# Altium PCB 核心板.PcbDoc (part 1 of 2)
Units mil, origin at the board's own origin, x right, y up, seen from the top; angles counter-clockwise.
Board outline 3687.4 x 2855.91 mil, 2 copper layers (Top Layer, Bottom Layer); 94 components, 147 nets, 533 pads, 209 vias.
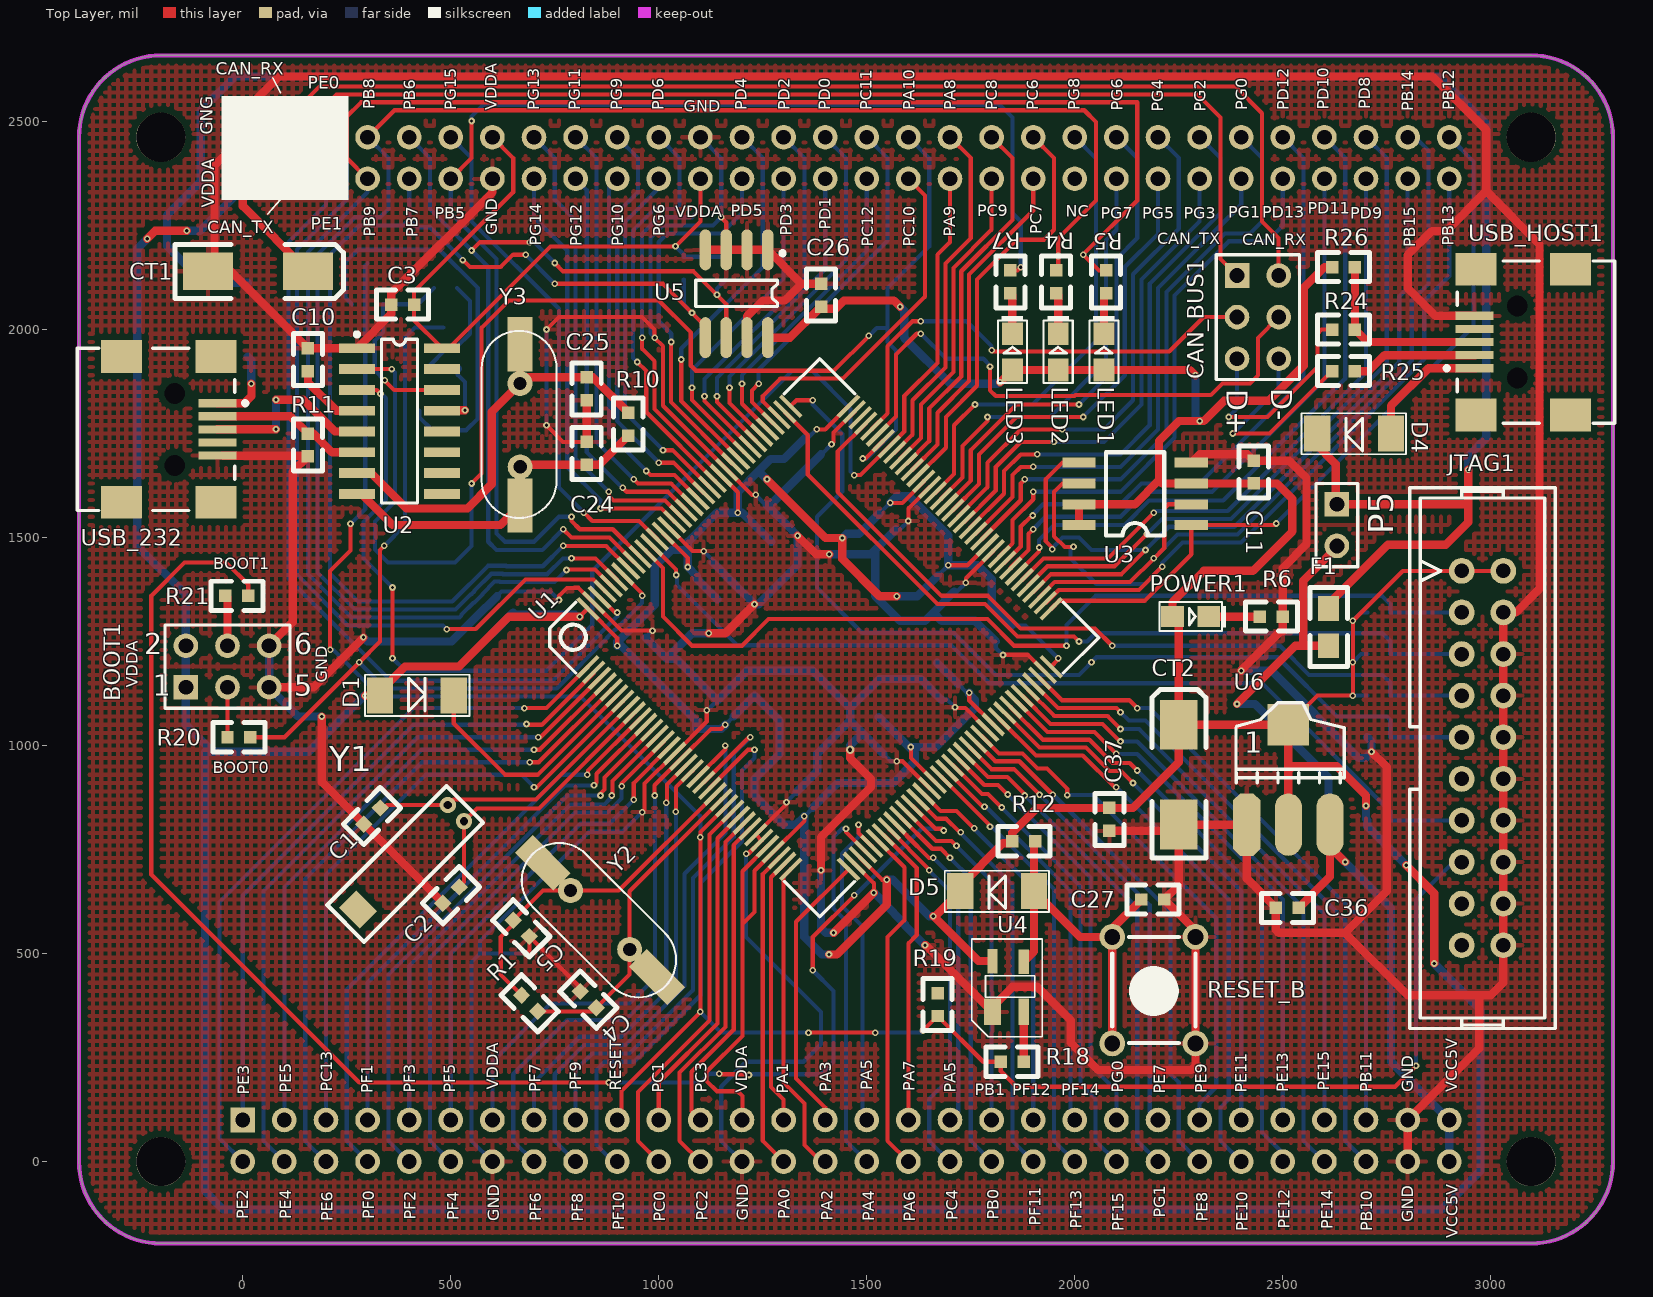
[diagram p0: Top Layer view]
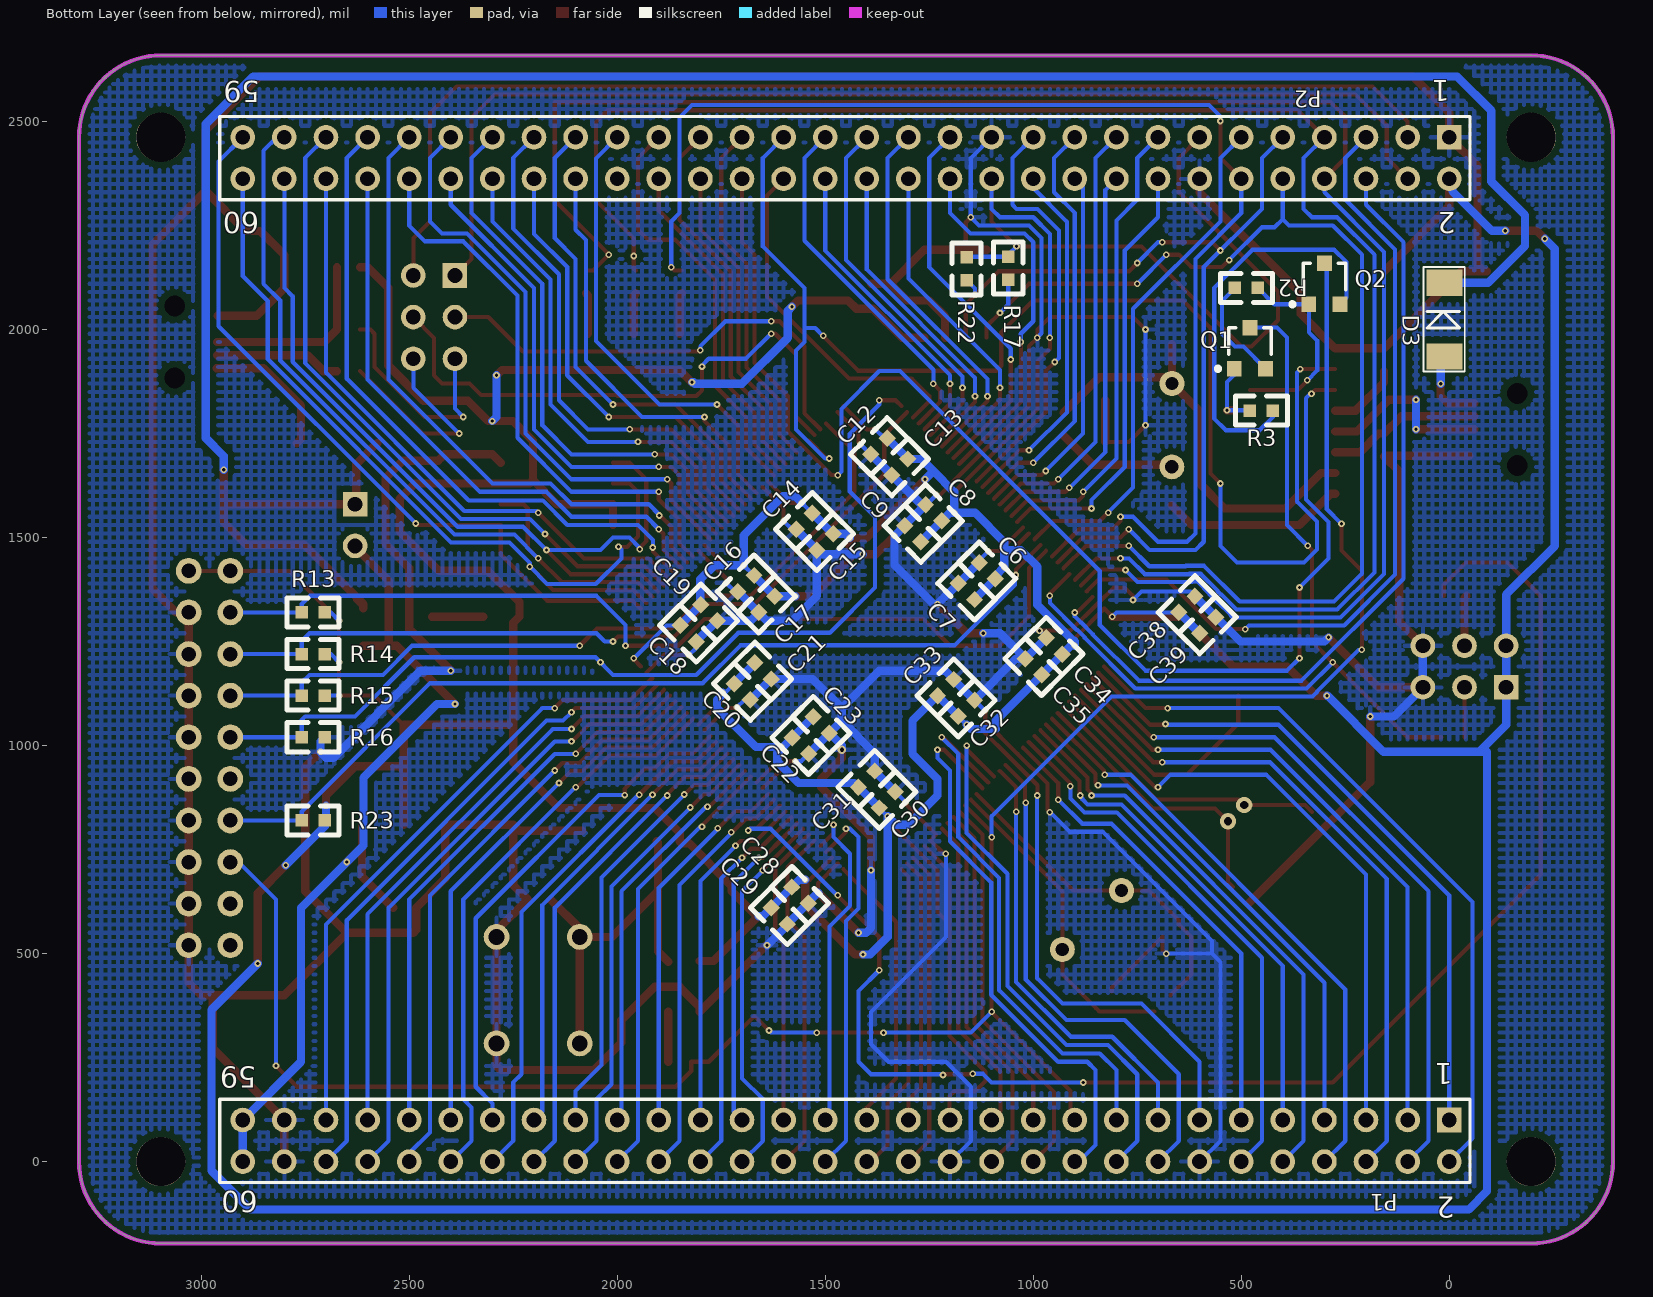
[diagram p1: Bottom Layer view, seen from below]

## Layer stack, top to bottom
Top Layer: signal copper 1.4
Dielectric: dielectric 12.6, FR-4, Dk 4.8
Bottom Layer: signal copper 1.4

## Board outline
-393.7,0 ccw(c-196.85,0) -196.85,-196.85 3096.85,-196.85 ccw(c3096.85,0) 3293.7,0 3293.7,2462.2 ccw(c3096.85,2462.2) 3096.85,2659.06 -196.85,2659.06 ccw(c-196.85,2462.2) -393.7,2462.2

## Design rules (kind name [scope] priority, off if disabled: settings)
Clearance Clearance_1 [Inpolygon] p1: gap=15
Clearance [All] p2: gap=9
HoleSize [All] p1: absolutevalues=TRUE maxlimit=196.85 minlimit=1 maxpercent=80.000 minpercent=20.000
MinimumSolderMaskSliver [All] p1: minsoldermaskwidth=0
PolygonConnect [All] p1: connectstyle=Relief reliefconductorwidth=10 reliefentries=4 polygonreliefangle="90 Angle"
RoutingVias [All] p1: holewidth=8 width=16 viastyle="Through Hole" minholewidth=8 minwidth=16 maxholewidth=8 maxwidth=16
SilkToSilkClearance [All] p1: silktosilkclearance=0
SilkscreenOverComponentPads [All] p1: minsilkscreentomaskgap=0
SolderMaskExpansion [All] p1: expansion=4
TestPointUsage [All] p1: valid=0 allowmultiple=FALSE
Testpoint [All] p1: side=3 testpointundercomponent=TRUE minsize=40 maxsize=100 preferedsize=60 minholesize=0 maxholesize=40 preferedholesize=32 testpointgrid=1 style=297 order=0123456789
Width [All] p1: maxlimit=39.37 minlimit=10 preferedwidth=10
20 further rules are at their usual default settings.

## Components (designator, comment, footprint, x,y, rotation, side; value= is the part's Value field where it differs from the comment)
BOOT1 "双排插针" HDR2X3 -136.69,1140 r0 top
C1 "电容(贴片)" 0603 330,850 r225 top
C2 "电容(贴片)" 0603 520,660 r225 top
C3 "电容(贴片)" 0603 356.69,2060 r0 top
C4 "电容(贴片)" 0603 850,370 r135 top
C5 "电容(贴片)" 0603 650,580 r315 top
C6 "电容(贴片)" 0603 1130,1440 r225 bottom
C7 "电容(贴片)" 0603 1180,1390 r225 bottom
C8 "电容(贴片)" 0603 1220,1540 r45 bottom
C9 "电容(贴片)" 0603 1270,1490 r45 bottom
C10 "电容(贴片)" 0603 156.69,1900 r90 top
C11 "电容(贴片)" 0603 2430,1630 r90 top
C12 "电容(贴片)" 0603 1390,1700 r135 bottom
C13 "电容(贴片)" 0603 1340,1650 r135 bottom
C14 "电容(贴片)" 0603 1570,1520 r135 bottom
C15 "电容(贴片)" 0603 1520,1470 r135 bottom
C16 "电容(贴片)" 0603 1710,1370 r135 bottom
C17 "电容(贴片)" 0603 1660,1320 r135 bottom
C18 "电容(贴片)" 0603 1810,1250 r45 bottom
C19 "电容(贴片)" 0603 1760,1300 r45 bottom
C20 "电容(贴片)" 0603 1680,1110 r45 bottom
C21 "电容(贴片)" 0603 1630,1160 r45 bottom
C22 "电容(贴片)" 0603 1540,980 r45 bottom
C23 "电容(贴片)" 0603 1490,1030 r45 bottom
C24 "电容(贴片)" 0603 826.69,1730 r270 top
C25 "电容(贴片)" 0603 826.69,1830 r90 top
C26 "电容(贴片)" 0603 1390,2110 r270 top
C27 "电容(贴片)" 0603 2160,630 r0 top
C28 "电容(贴片)" 0603 1580,660 r225 bottom
C29 "电容(贴片)" 0603 1630,610 r225 bottom
C30 "电容(贴片)" 0603 1370,850 r135 bottom
C31 "电容(贴片)" 0603 1420,900 r135 bottom
C32 "电容(贴片)" 0603 1180,1070 r135 bottom
C33 "电容(贴片)" 0603 1230,1120 r135 bottom
C34 "电容(贴片)" 0603 930,1220 r45 bottom
C35 "电容(贴片)" 0603 980,1170 r45 bottom
C36 "电容(贴片)" 0603 2483.31,610 r0 top
C37 "电容(贴片)" 0603 2083.31,850 r270 top
C38 "电容(贴片)" 0603 650,1320 r135 bottom
C39 "电容(贴片)" 0603 600,1270 r135 bottom
CAN_BUS1 "双排插针" HDR2X3 2390,2130 r270 top
CT1 "钽电容(贴片)" 6032 156.69,2140 r0 top
CT2 "钽电容(贴片)" 6032 2250,1050 r90 top
D1 "二极管(贴片)" D1206 330,1120 r0 top
D3 "二极管(贴片)" D1206 11.81,1935.2 r90 bottom
D4 "二极管(贴片)" D1206 2760,1750 r180 top
D5 "二极管(贴片)" D1206 1902.04,650 r180 top
F1 "保险丝(贴片)" 0805 2610,1240 r90 top
JTAG1 "JTAG插座" JTAG_20 2980,970 r270 top
LED1 "二极管(贴片发光绿色)" LED-0805 2075,1902 r90 top
LED2 "二极管(贴片发光绿色)" LED-0805 1965,1902 r90 top
LED3 "二极管(贴片发光绿色)" LED-0805 1855,1902 r90 top
P1 "双排插针" HDR2X30 0,100 r0 bottom
P2 "双排插针" HDR2X30 0,2462.2 r0 bottom
P5 "Header 2" HDR1X2 2630,1580 r270 top
POWER1 "二极管(贴片发光红色)" LED-0805 2234.01,1305 r0 top
Q1 "三极管" sot-23 479.05,1955 r180 bottom
Q2 "三极管" sot-23 300,2110 r180 bottom
R1 "电阻(贴片)" 0603 670,400 r315 top
R2 "电阻(贴片)" 0603 460,2100 r0 bottom
R3 "电阻(贴片)" 0603 479.05,1805 r180 bottom
R4 "电阻(贴片)" 0603 1955,2142 r270 top
R5 "电阻(贴片)" 0603 2075,2142 r270 top
R6 "电阻(贴片)" 0603 2500,1310 r180 top
R7 "电阻(贴片)" 0603 1845,2142 r270 top
R10 "电阻(贴片)" 0603 926.69,1800 r270 top
R11 "电阻(贴片)" 0603 156.69,1750 r270 top
R12 "电阻(贴片)" 0603 1850,770 r0 top
R13 "电阻(贴片)" 0603 2703.31,1320 r0 bottom
R14 "电阻(贴片)" 0603 2703.31,1220 r0 bottom
R15 "电阻(贴片)" 0603 2703.31,1120 r0 bottom
R16 "电阻(贴片)" 0603 2703.31,1020 r0 bottom
R17 "电阻(贴片)" 0603 1060,2120 r90 bottom
R18 "电阻(贴片)" 0603 1822.04,240 r0 top
R19 "电阻(贴片)" 0603 1670,350 r90 top
R20 "电阻(贴片)" 0603 -36.69,1020 r0 top
R21 "电阻(贴片)" 0603 13.31,1360 r180 top
R22 "电阻(贴片)" 0603 1160,2118.5 r90 bottom
R23 "电阻(贴片)" 0603 2703.31,820 r0 bottom
R24 "电阻(贴片)" 0603 2673.31,2000 r180 top
R25 "电阻(贴片)" 0603 2673.31,1900 r180 top
R26 "电阻(贴片)" 0603 2673.31,2150 r180 top
RESET_B "复位按键" KEY_M 2290,540 r270 top
U1 "集成电路" LQFP144 830,1190 r45 top
U2 "集成电路" SOP16M 376.69,1780 r270 top
U3 "集成电路" SOIC-8 2280,1530 r180 top
U4 "集成电路贴片" MAX811T 1802.04,360 r90 top
U5 "集成电路贴片" SOP8 1260,2190 r270 top
U6 "三端稳压芯片" AMS1117 2413.31,810 r0 top
USB_232 "Mini USB 座 (贴片)" USB/SM0.8-6H5 -370,1760 r180 top
USB_HOST1 "Mini USB 座 (贴片)" USB/SM0.8-6H5 3270,1970 r0 top
Y1 "晶体(直插)" 32.768khz 500,850 r225 top
Y2 "晶体(贴片)" CRYSTAL_SMD 930,510 r45 top
Y3 "晶体(贴片)" CRYSTAL_SMD 666.69,1670 r0 top

## Footprints (in the part's own frame and the unit in brackets; to place one, negate y for a bottom-side part, rotate by r counter-clockwise, add the part's x,y. Pads: shape width x height; smd on the part's side, far side on the other; paste and mask are expansions set on the pad)
32.768khz [mm]
  round 1 hole 0.5: 1(0,-0.254) 2(0,1.143)
  rect 1.5x1.8 smd: 3(8.382,0.381)
  silkscreen extent -0.76,-1.14 9.53,2.03
0603 [mil]
  rect 30x30 smd: 1(0,0) 2(55,0)
  silkscreen extent -35,-35 90,35
0805 [mil]
  rect 60x50 smd: 1(0,-0.06) 2(90,-0.06)
  silkscreen extent -50,-45 140,45
6032 [mil]
  rect 120x90 smd: 1(0,0) 2(-240,0)
  silkscreen extent -320,-65 85,65
AMS1117 [mil]
  oct 65x150 smd: 1(0.03,-0.06)
  oval 65x150 smd: 2(100.03,-0.06) 3(200.03,-0.06)
  rect 100x100 smd: 4(100.03,239.94)
  silkscreen extent -26,100 234,293
CRYSTAL_SMD [mil]
  rect 60x130 smd: 1(-0.46,-93.11) 2(-0.46,294.61)
  round 60 hole 32: 1(0,0) 2(-0.43,200.43)
  silkscreen extent -93,-123 88,327
D1206 [mm]
  rect 1.6x2.2 smd: 1(0,0) 2(4.5,0)
  silkscreen extent -0.91,-1.24 5.46,1.27
HDR1X2 [mm] "Connector; Header; 2 Position"
  rect 1.5x1.5 hole 0.9: 1(0,0)
  round 1.5 hole 0.9: 2(2.54,0)
  silkscreen extent -1.27,-1.27 3.81,1.27
HDR2X3 [mm] "Connector; Header; 3x2 Position"
  rect 1.5x1.5 hole 0.9: 1(0,0)
  round 1.5 hole 0.9: 2(0,2.54) 3(2.54,0) 4(2.54,2.54) 5(5.08,0) 6(5.08,2.54)
  silkscreen extent -1.27,-1.27 6.35,3.81
HDR2X30 [mm] "Connector; Header; 30x2 Position"
  rect 1.5x1.5 hole 0.9: 1(0,0)
  round 1.5 hole 0.9: 2(0,2.54) 3(2.54,0) 4(2.54,2.54) 5(5.08,0) 6(5.08,2.54) 7(7.62,0) 8(7.62,2.54) 9(10.16,0) 10(10.16,2.54) 11(12.7,0) 12(12.7,2.54) 13(15.24,0) 14(15.24,2.54) 15(17.78,0) 16(17.78,2.54) 17(20.32,0) 18(20.32,2.54) 19(22.86,0) 20(22.86,2.54) 21(25.4,0) 22(25.4,2.54) 23(27.94,0) 24(27.94,2.54) 25(30.48,0) 26(30.48,2.54) 27(33.02,0) 28(33.02,2.54) 29(35.56,0) 30(35.56,2.54) 31(38.1,0) 32(38.1,2.54) 33(40.64,0) 34(40.64,2.54) 35(43.18,0) 36(43.18,2.54) 37(45.72,0) 38(45.72,2.54) 39(48.26,0) 40(48.26,2.54) 41(50.8,0) 42(50.8,2.54) 43(53.34,0) 44(53.34,2.54) 45(55.88,0) 46(55.88,2.54) 47(58.42,0) 48(58.42,2.54) 49(60.96,0) 50(60.96,2.54) 51(63.5,0) 52(63.5,2.54) 53(66.04,0) 54(66.04,2.54) 55(68.58,0) 56(68.58,2.54) 57(71.12,0) 58(71.12,2.54) 59(73.66,0) 60(73.66,2.54)
  silkscreen extent -1.27,-1.27 75.06,3.81
JTAG_20 [mil]
  round 62 hole 35: 1(-450,-50) 2(-450,50) 3(-350,-50) 4(-350,50) 5(-250,-50) 6(-250,50) 7(-150,-50) 8(-150,50) 9(-50,-50) 10(-50,50) 11(50,-50) 12(50,50) 13(150,-50) 14(150,50) 15(250,-50) 16(250,50) 17(350,-50) 18(350,50) 19(450,-50) 20(450,50)
  silkscreen extent -650,-175 650,175
KEY_M [mil]
  round 62 hole 38: 1(0,0) 1(255.91,0) 2(0,-200) 2(255.91,-200)
  silkscreen extent 0,-200 255,0
LED-0805 [mil]
  rect 55.12x50 smd: 1(0.99,5) 2(88,5)
  silkscreen extent -31,-30 130,40
LQFP144 [mil]
  rect 70.87x10 smd: 1(-0.35,0.02) 2(-0.35,-19.66) 3(-0.35,-39.35) 4(-0.35,-59.03) 5(-0.35,-78.72) 6(-0.35,-98.4) 7(-0.35,-118.09) 8(-0.35,-137.77) 9(-0.35,-157.46) 10(-0.35,-177.14) 11(-0.35,-196.83) 12(-0.35,-216.51) 13(-0.35,-236.2) 14(-0.35,-255.88) 15(-0.35,-275.57) 16(-0.35,-295.25) 17(-0.35,-314.94) 18(-0.35,-334.62) 19(-0.35,-354.31) 20(-0.35,-373.99) 21(-0.35,-393.68) 22(-0.35,-413.36) 23(-0.35,-433.05) 24(-0.35,-452.73) 25(-0.35,-472.42) 26(-0.35,-492.1) 27(-0.35,-511.79) 28(-0.35,-531.47) 29(-0.35,-551.16) 30(-0.35,-570.84) 31(-0.35,-590.53) 32(-0.35,-610.21) 33(-0.35,-629.9) 34(-0.35,-649.58) 35(-0.35,-669.27) 36(-0.35,-688.95) 73(885.47,-688.95) 74(885.47,-669.27) 75(885.47,-649.58) 76(885.47,-629.9) 77(885.47,-610.21) 78(885.47,-590.53) 79(885.47,-570.84) 80(885.47,-551.16) 81(885.47,-531.47) 82(885.47,-511.79) 83(885.47,-492.1) 84(885.47,-472.42) 85(885.47,-452.73) 86(885.47,-433.05) 87(885.47,-413.36) 88(885.47,-393.68) 89(885.47,-373.99) 90(885.47,-354.31) 91(885.47,-334.62) 92(885.47,-314.94) 93(885.47,-295.25) 94(885.47,-275.57) 95(885.47,-255.88) 96(885.47,-236.2) 97(885.47,-216.51) 98(885.47,-196.83) 99(885.47,-177.14) 100(885.47,-157.46) 101(885.47,-137.77) 102(885.47,-118.09) 103(885.47,-98.4) 104(885.47,-78.72) 105(885.47,-59.03) 106(885.47,-39.35) 107(885.47,-19.66) 108(885.47,0.02)
  rect 10x70.87 smd: 37(98.07,-787.38) 38(117.76,-787.38) 39(137.44,-787.38) 40(157.13,-787.38) 41(176.81,-787.38) 42(196.5,-787.38) 43(216.18,-787.38) 44(235.87,-787.38) 45(255.55,-787.38) 46(275.24,-787.38) 47(294.92,-787.38) 48(314.61,-787.38) 49(334.29,-787.38) 50(353.98,-787.38) 51(373.66,-787.38) 52(393.35,-787.38) 53(413.03,-787.38) 54(432.72,-787.38) 55(452.4,-787.38) 56(472.09,-787.38) 57(491.77,-787.38) 58(511.46,-787.38) 59(531.14,-787.38) 60(550.83,-787.38) 61(570.51,-787.38) 62(590.2,-787.38) 63(609.88,-787.38) 64(629.57,-787.38) 65(649.25,-787.38) 66(668.94,-787.38) 67(688.62,-787.38) 68(708.31,-787.38) 69(727.99,-787.38) 70(747.68,-787.38) 71(767.36,-787.38) 72(787.05,-787.38) 109(787.05,98.45) 110(767.36,98.45) 111(747.68,98.45) 112(727.99,98.45) 113(708.31,98.45) 114(688.62,98.45) 115(668.94,98.45) 116(649.25,98.45) 117(629.57,98.45) 118(609.88,98.45) 119(590.2,98.45) 120(570.51,98.45) 121(550.83,98.45) 122(531.14,98.45) 123(511.46,98.45) 124(491.77,98.45) 125(472.09,98.45) 126(452.4,98.45) 127(432.72,98.45) 128(413.03,98.45) 129(393.35,98.45) 130(373.66,98.45) 131(353.98,98.45) 132(334.29,98.45) 133(314.61,98.45) 134(294.92,98.45) 135(275.24,98.45) 136(255.55,98.45) 137(235.87,98.45) 138(216.18,98.45) 139(196.5,98.45) 140(176.81,98.45) 141(157.13,98.45) 142(137.44,98.45) 143(117.76,98.45) 144(98.07,98.45)
  silkscreen extent -32,-819 917,130
MAX811T [mil]
  rect 63x40 smd: 1(0,0)
  rect 63x25 smd: 2(0,-75)
  rect 59.05x25 smd: 3(120,-75) 4(122.05,0)
  silkscreen extent -60,-120 175,50
SOIC-8 [mil]
  rect 80x24 smd: 1(0,0) 2(0,-50.06) 3(0,-100.06) 4(0,-150.06) 5(270,-150) 6(270,-100) 7(270,-50) 8(270,0)
  silkscreen extent 65,-175 205,25
SOP8 [mm]
  oval 2.5x0.7 smd: 1(-0.037,0.051) 2(-0.037,-1.219) 3(-0.037,-2.489) 4(-0.037,-3.759) 5(5.32,-3.759) 6(5.32,-2.489) 7(5.32,-1.219) 8(5.32,0.051)
  silkscreen extent 0.04,-4.35 3.42,1.08
SOP16M [mm]
  rect 0.6x2.2 smd: 1(-4.445,-2.6) 2(-3.175,-2.6) 3(-1.905,-2.6) 4(-0.635,-2.6) 5(0.635,-2.6) 6(1.905,-2.6) 7(3.175,-2.6) 8(4.445,-2.6) 9(4.445,2.6) 10(3.175,2.6) 11(1.905,2.6) 12(0.635,2.6) 13(-0.635,2.6) 14(-1.905,2.6) 15(-3.175,2.6) 16(-4.445,2.6)
  silkscreen extent -5.42,-2.72 5,1.1
sot-23 [mm] "SOT-23; 3 Leads; Body 3.0 x 2.6 mm, inc. leads (LxW max)"
  rect 0.9x0.95 smd: 1(-0.95,-1.25) 2(0.95,-1.25) 3(0,1.25)
  silkscreen extent -2.08,-1.37 1.3,1.25
USB/SM0.8-6H5 [mm]
  rect 2.3x0.5 smd: 1(-7.85,-1.6) 2(-7.85,-0.8) 3(-7.85,0) 4(-7.85,0.8) 5(-7.85,1.6)
  rect 2.5x2 smd: 6(-7.75,4.45) 7(-1.996,4.45) 8(-7.75,-4.45) 9(-1.996,-4.45)
  round 0.6 hole 1.27 unplated: MH1(-5.25,2.2) MH2(-5.25,-2.2)
  silkscreen extent -9.68,-4.95 0.7,4.95

## Part data
BOOT1 CAN_BUS1: library part "Header 3X2", "Header, 3-Pin, Dual row"
C1 C2: library part Cap, "Capacitor 10pF"
C3 C10 C11 C12 C13 C14 C15 C16 C17 C18 C19 C20 C21 C22 C23 C28 C29 C30 C31 C32 C33 C34 C35 C36 C37 C38 C39: library part "CAP_0.1uF X7R 0603", "0603X7R104J160NT(0.1uF)"
C4 C5: library part Cap, "Capacitor 22pF"
C6 C9: library part Cap, "Capacitor 10uf"
C7 C8: library part Cap, "Capacitor 0.1uf"
C24 C25: library part "CAP_33pF COG 0603", "0603COG330J500NT(33pF)"
C26 C27: library part "CAP_10uF/10V Z5U 0603", "0603Z5U106J100NT(10uF/10V)"
CT1 CT2: library part "CAP TAN 100uF/10V/6032", "100uF/10V/6032封装"
D1 D3 D4 D5: library part "DIODE 1N4148/1206", "1N4148/1206"
F1: library part "Fuse 1", "Fuse"
JTAG1: library part JTAG
LED1 LED2 LED3 POWER1: library part "LED_GREEN 0805", "LED-0805"
P1 P2: library part "Header 30X2", "Header, 30-Pin, Dual row"
P5: "Header, 2-Pin"
Q1: library part 2N3904, "NPN General Purpose Amplifier"
Q2: library part 2N3906, "PNP General Purpose Amplifier"
R1: library part Res3, "电阻"
R2 R3 R10 R11: library part "RES_1MΩ 5% 0603", "RS-03K-105±5%(1MΩ)"
R4 R5 R6 R7 R19 R24 R25 R26: library part "RES_1K  5% 0603", "RS-03K-102±5%(1KΩ)"
R12 R13 R14 R15 R16 R20 R21 R23: library part "RES_10K 5% 0603", "RS-03K-103±5%(10KΩ)"
R17 R22: library part "RES_1.5K  5% 0603", "RS-03K-152±5%(1.5KΩ)"
R18: library part "RES_470 5% 0603", "RS-03K-471±5%(470Ω)"
RESET_B: library part KEY_M
U1: library part STM32F103ZET6, "STM32F103ZET6"
U2: library part CH340G, "USB2UART"
U3: library part W25X16, "W25X16;SST25VF016;MX25L1605"
U4: library part "Power MAX811T", "MAX811T/SOT143  电源管理芯片"
U5: library part AT24C02A, "AT24C02/SOP08"
U6: library part AMS1117
USB_232 USB_HOST1: library part USB5
Y1: library part "CRYSTAL 12M HC-49SMD", "HC-49DIP/32.768KHz"
Y2: library part "CRYSTAL 12M HC-49SMD", "HC-49SMD/8.000MHz"
Y3: library part "CRYSTAL 12M HC-49SMD", "HC-49SMD/12.000MHz"

## Free pads (board coordinates)
  round 118.11 hole 118.11: 0(-196.85,0) 0(-196.85,2462.2) 0(3096.85,0) 0(3096.85,2462.2)

## Via types
v1: diameter 16, hole 8, Top Layer to Bottom Layer, 208 vias
v2: diameter 20, hole 10, Top Layer to Bottom Layer, 1 vias

## Nets (pads, with @x,y where several pads share a name; then routed paths per layer and width w, separated by ;. In a path a pad name is that pad's centre, name@x,y a point inside that pad or via, vN(x,y) a via of type N, cw(c..) or ccw(c..) an arc to the next point about the centre after c; other vN are vias at no path point)
BOOT0: Q1.3 R20.2 U1.138 | length 2146.3
  Top Layer w10: R20.2@18.31,1020 100,1020 v1(280,1200) 330,1250 330,1470 v1(340.07,1480.07) ; U1.138@913.25,1412.48 960,1365.73 v1(960,1360)
  Bottom Layer w10: v1(280,1200) 343,1137 754.65,1137 876,1258.35 876,1259.94 893.69,1277.63 895.28,1277.63 960,1342.35 v1(960,1360) ; v1(340.07,1480.07) 390,1530 390,1981 414,2005 Q1.3@482,2005
BOOT1: R21.1 U1.48 | length 3701.1
  Top Layer w10: R21.1@13.31,1360 13.31,1386.69 -40,1440 -140,1440 -220,1360 -220,690 280,190 v1(880,190) ; v1(1145,211) 1146,210 1215,210 v1(1217,208) ; v1(1370,460) 1370,540 v1(1470,640) ; U1.48@1609.22,855.7 1664.92,800 1681,800 v1(1685,796)
  Bottom Layer w10: v1(880,190) 1100,190 1121,211 v1(1145,211) ; v1(1217,208) 1219,210 1390,210 1420,240 1420,410 v1(1370,460) ; v1(1470,640) 1471,640 1631,800 1681,800 v1(1685,796)
CAN_RX: CAN_BUS1.2 P2.3 | length 2855.8
  Top Layer w10: P2.3@100,2462.2 100,2500 184.2,2584.2 2385.8,2584.2 2450,2520 2450,2260 2490,2220 CAN_BUS1.2@2490,2130
CAN_TX: CAN_BUS1.1 P2.4 | length 2799.1
  Top Layer w10: P2.4@100,2362.2 150,2412.2 150,2490 225.2,2565.2 2294.8,2565.2 2350,2510 2350,2170 CAN_BUS1.1@2390,2130
CH0: P1.28 U1.34 | length 767.3
  Top Layer w10: U1.34@1289.07,730.43 1250,691.35 1250,50 P1.28@1300,0
CH1: P1.27 U1.35 | length 642.6
  Top Layer w10: P1.27@1300,100 1300,149.44 1270,179.44 1270,683.51 U1.35@1302.99,716.51
CH2: P1.30 U1.36 | length 756.9
  Top Layer w10: U1.36@1316.91,702.59 1300,685.68 1300,190 1350,140 1350,40 1390,0 P1.30@1400,0
CH3: P1.29 U1.37 | length 683.8
  Top Layer w10: P1.29@1400,100 1400,130 1330,200 1330,576.48 U1.37@1456.11,702.59
CH4: P1.36 U1.44 | length 902.1
  Top Layer w10: U1.44@1553.54,800.02 1553.54,799.05 1650,702.6 v1(1650,700)
  Bottom Layer w10: v1(1650,700) 1700,650 1700,200 1650,150 1650,50 P1.36@1700,0
CH5: P1.35 U1.45 | length 791.6
  Top Layer w10: U1.45@1567.46,813.94 1567.46,812.97 1596.13,784.3 1596.13,783.33 1649.47,730 v1(1660,730)
  Bottom Layer w10: v1(1660,730) 1720,670 1720,650 1720,120 P1.35@1700,100
CH6: P1.34 U1.42 | length 836.4
  Top Layer w10: U1.42@1525.7,772.18 1590.32,707.57 1590.32,580.32 1550,540 1550,50 P1.34@1600,0
CH7: P1.33 U1.43 | length 727.7
  Top Layer w10: U1.43@1539.62,786.1 1620,705.73 1620,544.72 1600,524.72 P1.33@1600,100
CH8: P1.38 U1.46 | length 930.6
  Top Layer w10: U1.46@1581.38,827.86 1657.24,752 1678,752 v1(1700,730)
  Bottom Layer w10: v1(1700,730) 1750,680 1750,50 P1.38@1800,0
CH9: P1.37 U1.47 | length 848.6
  Top Layer w10: U1.47@1595.3,841.78 1666.08,771 1703.63,771 v1(1715.63,758.99)
  Bottom Layer w10: v1(1715.63,758.99) 1800,674.63 1800,360 P1.37@1800,100
CH10: P1.22 U1.26 | length 956.8
  Top Layer w10: P1.22@1000,0 950,50 950,167.61 1122,339.61 1122,786.06 U1.26@1177.72,841.78
CH11: P1.21 U1.27 | length 807.2
  Top Layer w10: P1.21@1000,100 1000,190.74 1141,331.74 1141,777.22 U1.27@1191.64,827.86
CH12: P1.24 U1.28 | length 899.1
  Top Layer w10: P1.24@1100,0 1050,50 1050,213.87 1160,323.87 1160,768.39 U1.28@1205.56,813.94
CH13: P1.23 U1.29 | length 766.9
  Top Layer w10: P1.23@1100,100 1079,121 1079,216 1180,317 1180,760.55 U1.29@1219.48,800.02
DAC_OUT1: P1.32 U1.40 | length 926.9
  Top Layer w10: v1(1450,800) 1450,792.21 U1.40@1497.86,744.35
  Bottom Layer w10: v1(1450,800) 1440,800 1420,780 1420,608 1450,578 1450,50 P1.32@1500,0
DAC_OUT2: P1.31 U1.41 | length 816.4
  Top Layer w10: v1(1480,810) v1(1480,810) 1479.95,790.1 U1.41@1511.78,758.26
  Bottom Layer w10: v1(1480,810) 1480,780 1440,740 1440,614.87 1490,564.87 1490,110 P1.31@1500,100
DM9000_INT: P2.43 U1.91 | length 1180.7
  Top Layer w10: U1.91@1692.74,1579.51 1750,1636.77 1750,1710 1860,1820 v1(2010,1820)
  Bottom Layer w10: v1(2010,1820) 2100,1910 2100,2170 2150,2220 2150,2412.2 P2.43@2100,2462.2
DM9000_RST: P2.22 U1.123 | length 872.2
  Top Layer w10: v1(1010,1710) 1033.31,1710 U1.123@1122.04,1621.27
  Bottom Layer w10: P2.22@1000,2362.2 1000,2340 919,2259 919,1801 v1(1010,1710)
DTR: Q1.1 R3.1 U2.13 | length 185.9
  Top Layer w20: U2.13@514,1806 v1(534,1806)
  Bottom Layer w10: R3.1@479.05,1805 480.05,1806 v1(534,1806) 534,1874 516.46,1891.54 Q1.1@516.46,1905.79
  Bottom Layer w20: Q1.1@514,1903.33 Q1.1@516.46,1905.79
F_CS: P2.59 U1.73 U3.1 | length 1816.4
  Top Layer w10: U1.73@1943.28,1328.96 1962.32,1348 2168,1348 2280,1460 U3.1@2280,1530 2482,1530 2484,1532 v1(2484,1534)
  Bottom Layer w10: v1(2484,1534) 2958,2008 2958,2404.2 P2.59@2900,2462.2
FSMC_A0: P1.8 U1.10 | length 1415
  Top Layer w10: v1(828,930) 830,930 830,940 954.49,1064.49 U1.10@955.01,1064.49
  Bottom Layer w10: P1.8@300,0 250,50 250,414.01 765.99,930 v1(828,930)
FSMC_A1: P1.7 U1.11 | length 1268.8
  Top Layer w10: v1(844.42,904.42) 844.42,904.64 844.67,904.89 844.89,904.89 850.65,910.65 850.65,932.29 U1.11@968.93,1050.57
  Bottom Layer w10: P1.7@300,100 300,430 774.42,904.42 v1(844.42,904.42)
FSMC_A2: P1.10 U1.12 | length 1366.4
  Top Layer w10: v1(860,880) 860,884.49 869.65,894.14 869.65,923.45 U1.12@982.85,1036.65
  Bottom Layer w10: P1.10@400,0 350,50 350,450 780,880 v1(860,880)
FSMC_A3: P1.9 U1.13 | length 1220.5
  Top Layer w10: v1@886.62,877.1 888.65,879.13 888.65,914.61 U1.13@996.77,1022.73
  Bottom Layer w10: P1.9@400,100 400,470 788,858 869.11,858 882,870.89 882,872.73 886.27,877 886.52,877 886.62,877.1 v1(886.62,880)
FSMC_A4: P1.12 U1.14 | length 1307.4
  Top Layer w10: v1(910.65,901.87) 910.65,908.77 U1.14@1010.68,1008.81
  Bottom Layer w10: P1.12@500,0 450,50 450,490 799,839 876.98,839 910.65,872.66 v1(910.65,901.87)
FSMC_A5: P1.11 U1.15 | length 1153.2
  Top Layer w10: v1(940,870) 940,910.29 U1.15@1024.6,994.89
  Bottom Layer w10: P1.11@500,100 500,500 812,812 882,812 v1(940,870)
FSMC_A6: P1.39 U1.50 | length 914.9
  Top Layer w10: U1.50@1637.06,883.54 1677.6,843 1716,843 v1(1758,801)
  Bottom Layer w10: v1(1758,801) 1758,800 1900,658 P1.39@1900,100
FSMC_A7: P1.42 U1.53 | length 1060.7
  Top Layer w10: U1.53@1678.82,925.3 1796,808.11 v1(1796,805)
  Bottom Layer w10: v1(1796,805) 1800,805 1950,655 1950,50 P1.42@2000,0
FSMC_A8: P1.41 U1.54 | length 973.4
  Top Layer w10: U1.54@1692.74,939.22 1780.95,851 1782,851 1783,852 v1(1783,853)
  Bottom Layer w10: v1(1783,853) 1787,853 1990,650 1990,110 P1.41@2000,100
FSMC_A9: P1.44 U1.55 | length 1126
  Top Layer w10: U1.55@1706.65,953.14 1707.47,953.14 1776.61,884 1791,884 v1(1824,851) v1@1824,852
  Bottom Layer w10: v1(1824,851) 2014,661 2014,186 2050,150 2050,50 P1.44@2100,0
FSMC_A10: P1.43 U1.56 | length 1043.8
  Top Layer w10: U1.56@1720.57,967.06 1782.37,905.26 1815.74,905.26 v1(1838.64,882.36)
  Bottom Layer w10: v1(1838.64,882.36) 2038,683 2038,232 2100,170 P1.43@2100,100
FSMC_A11: P1.46 U1.57 | length 1201
  Top Layer w10: U1.57@1734.49,980.98 1791.21,924.26 1837.73,924.26 1880,881.99 v1(1880,880)
  Bottom Layer w10: v1(1880,880) 2150,610 2150,50 P1.46@2200,0
FSMC_A12: P2.47 U1.87 | length 1348.9
  Top Layer w10: U1.87@1748.41,1523.83 1830,1605.42 1830,1660 1870,1700 v1(1910,1700)
  Bottom Layer w10: v1(1910,1700) 2110,1700 2180,1770 2180,2110 2350,2280 2350,2412.2 P2.47@2300,2462.2
FSMC_A13: P2.48 U1.88 | length 1175.9
  Top Layer w10: U1.88@1734.49,1537.75 1810,1613.26 1810,1670 1870,1730 v1(1950,1730)
  Bottom Layer w10: v1(1950,1730) 2070,1730 2160,1820 2160,2120.01 2300,2260.01 P2.48@2300,2362.2
FSMC_A14: P2.45 U1.89 | length 1267.7
  Top Layer w10: U1.89@1720.57,1551.67 1790,1621.1 1790,1680 1870,1760 v1(1970,1760)
  Bottom Layer w10: v1(1970,1760) 2070,1760 2140,1830 2140,2133 2250,2243 2250,2412.2 P2.45@2200,2462.2
FSMC_A15: P2.46 U1.90 | length 1094.7
  Top Layer w10: U1.90@1706.65,1565.59 1770,1628.94 1770,1700 1860,1790 v1(2020,1790)
  Bottom Layer w10: v1(2020,1790) 2120,1890 2120,2150 2200,2230 P2.46@2200,2362.2
FSMC_A16: P2.54 U1.80 | length 1447.4
  Top Layer w10: U1.80@1845.85,1426.4 1845.85,1427.36 1889,1470.52 1889,1509 v1(1900,1520)
  Bottom Layer w10: v1(1900,1520) 1930,1550 2110,1550 2170,1610 2330,1610 2600,1880 P2.54@2600,2362.2
FSMC_A17: P2.51 U1.81 | length 1532.2
  Top Layer w10: U1.81@1831.93,1440.32 1870,1478.39 1870,1526.37 1896.75,1553.12 v1(1898.88,1553.12)
  Bottom Layer w10: v1(1898.88,1553.12) 1898.88,1554.88 1924,1580 2110,1580 2160,1630 2300,1630 2550,1880 2550,2412.2 P2.51@2500,2462.2
FSMC_A18: P2.52 U1.82 | length 1367.4
  Top Layer w10: U1.82@1818.01,1454.23 1850,1486.22 1850,1541.99 1900,1591.99 v1(1900,1610)
  Bottom Layer w10: v1(1900,1610) 2110,1610 2240,1740 2240,2082 2370.13,2212.13 2462.13,2212.13 2500,2250 P2.52@2500,2362.2
FSMC_A19: P1.1 U1.2 | length 1607.8
  Top Layer w10: v1(682,1052) 684,1050 718.77,1050 843.65,1174.88 U1.2@843.65,1175.85
  Bottom Layer w10: P1.1@0,100 0,640 410,1050 680,1050 v1(682,1052)
FSMC_A20: P1.4 U1.3 | length 1690.3
  Top Layer w10: v1(710,1020) 715.64,1020 U1.3@857.57,1161.93
  Bottom Layer w10: P1.4@100,0 50,50 50,650 420,1020 v1(710,1020)
FSMC_A21: P1.3 U1.4 | length 1533.8
  Top Layer w10: v1(700,990) 713.74,990 871.49,1147.75 U1.4@871.49,1148.01
  Bottom Layer w10: P1.3@100,100 100,660 430,990 v1(700,990)
FSMC_A22: P1.6 U1.5 | length 1623.6
  Top Layer w10: v1(690,960) 711.32,960 U1.5@885.41,1134.09
  Bottom Layer w10: P1.6@200,0 150,50 150,678.89 431.11,960 v1(690,960)
FSMC_A23: P1.2 U1.1 | length 1767.3
  Top Layer w10: v1(677,1090) 729.97,1090 U1.1@829.73,1189.77
  Bottom Layer w10: P1.2@0,0 -56,56 -56,624 410,1090 v1(677,1090)
FSMC_A24: P2.15 U1.128 | length 1129.2
  Top Layer w10: v1(880,1610) 880,1600 890.87,1589.13 1014.99,1589.13 U1.128@1052.44,1551.67
  Bottom Layer w10: P2.15@700,2462.2 750,2412.2 750,2312.2 800,2262.2 800,1690 v1(880,1610)
FSMC_A25: P2.16 U1.129 | length 1050.4
  Top Layer w10: v1(860,1570) 1006.28,1570 U1.129@1038.52,1537.75
  Bottom Layer w10: P2.16@700,2362.2 700,2270 780,2190 780,1670 860,1590 v1(860,1570)
FSMC_CD: P1.17 U1.21 | length 1303.6
  Top Layer w10: U1.21@1108.12,911.38 1216.74,1020 v1(1220,1020)
  Bottom Layer w10: P1.17@800,100 800,220 840,260 930,260 1082,412 1082,682 1180,780 1180,980 v1(1220,1020)
FSMC_CLK: P2.28 U1.117 | length 800.6
  Top Layer w10: v1(1080,1860) 1080,1830.34 U1.117@1205.56,1704.78
  Bottom Layer w10: v1(1080,1860) 1080,1903 1300,2123 P2.28@1300,2362.2
FSMC_D0: P2.49 U1.85 | length 1435.9
  Top Layer w10: U1.85@1776.25,1495.99 1870,1589.74 1870,1630 v1(1880,1640)
  Bottom Layer w10: v1(1880,1640) 2110,1640 2220,1750 2220,2090 2361.13,2231.13 2421.13,2231.13 2450,2260 2450,2412.2 P2.49@2400,2462.2
FSMC_D1: P2.50 U1.86 | length 1257
  Top Layer w10: U1.86@1762.33,1509.91 1850,1597.58 1850,1650 1870,1670 v1(1900,1670)
  Bottom Layer w10: v1(1900,1670) 2110,1670 2200,1760 2200,2100 2400,2300 P2.50@2400,2362.2
FSMC_D2: P2.29 U1.114 | length 884.4
  Top Layer w10: v1(1170,1860) 1170,1823.86 U1.114@1247.31,1746.54
  Bottom Layer w10: v1(1170,1860) 1170,1887.15 1450,2167.15 1450,2412.2 P2.29@1400,2462.2
FSMC_D3: P2.30 U1.115 | length 776
  Top Layer w10: v1(1140,1840) 1140,1826.02 U1.115@1233.4,1732.62
  Bottom Layer w10: v1(1140,1840) 1140,1884.02 1400,2144.02 P2.30@1400,2362.2
FSMC_D4: P1.45 U1.58 | length 1113.4
  Top Layer w10: U1.58@1748.41,994.89 1800.05,943.26 1853.74,943.26 v1(1915,882)
  Bottom Layer w10: v1(1915,882) 2180,617 2180,120 P1.45@2200,100
FSMC_D5: P1.48 U1.59 | length 1266
  Top Layer w10: U1.59@1762.33,1008.81 1808.89,962.26 1866.51,962.26 v1(1947,881.76)
  Bottom Layer w10: v1(1947,881.76) 1948.24,881.76 2230,600 2230,210 2250,190 2250,50 P1.48@2300,0
FSMC_D6: P1.47 U1.60 | length 1255.4
  Top Layer w10: U1.60@1776.25,1022.73 1817.73,981.26 1874.38,981.26 1910.63,945 1933,945 1982,896 v1(1982,881)
  Bottom Layer w10: v1(1982,881) 2044,881 2340,585 2340,180 2300,140 P1.47@2300,100
FSMC_D7: P1.50 U1.63 | length 1391
  Top Layer w10: U1.63@1818.01,1064.49 1906.5,976 2019.15,976 2095.15,900 v1(2100,900)
  Bottom Layer w10: v1(2100,900) 2370,630 2370,150 2350,130 2350,50 P1.50@2400,0
FSMC_D8: P1.49 U1.64 | length 1295.5
  Top Layer w10: U1.64@1831.93,1078.41 1915.34,995 2027.02,995 2083.02,939 2111,939 v1(2140,910)
  Bottom Layer w10: v1(2140,910) 2400,650 P1.49@2400,100
FSMC_D9: P1.52 U1.65 | length 1452.6
  Top Layer w10: U1.65@1845.85,1092.33 1845.85,1091.67 1923.52,1014 2034.89,1014 2090.89,958 2132,958 v1(2150,940)
  Bottom Layer w10: v1(2150,940) 2450,640 2450,70.04 2500,20.04 P1.52@2500,0
FSMC_D10: P1.51 U1.66 | length 1367.5
  Top Layer w10: U1.66@1859.77,1106.25 1860.73,1106.25 1933.97,1033 2047,1033 v1(2100,980)
  Bottom Layer w10: v1(2100,980) 2150,980 2500,630 P1.51@2500,100
FSMC_D11: P1.54 U1.67 | length 1518.3
  Top Layer w10: U1.67@1873.69,1120.17 1941.85,1052 2066.89,1052 2108.89,1010 v1(2110,1010)
  Bottom Layer w10: v1(2110,1010) 2150,1010 2550,610 2550,50 P1.54@2600,0
FSMC_D12: P1.53 U1.68 | length 1430.5
  Top Layer w10: U1.68@1887.61,1134.09 1950.7,1071 2079,1071 v1(2110,1040)
  Bottom Layer w10: v1(2110,1040) 2154.72,1040 2600,594.72 P1.53@2600,100
FSMC_D13: P2.55 U1.77 | length 1647.4
  Top Layer w10: U1.77@1887.61,1384.64 1933.97,1431 2095.79,1431 v1(2173.55,1508.76)
  Bottom Layer w10: v1(2173.55,1508.76) 2173.76,1508.76 2210,1545 2375.5,1545 2750,1919.5 2750,2412.2 P2.55@2700,2462.2
FSMC_D14: P2.56 U1.78 | length 1498.3
  Top Layer w10: U1.78@1873.69,1398.56 1925.13,1450 2080,1450 v1(2190,1560)
  Bottom Layer w10: v1(2190,1560) 2194,1564 2367.63,1564 2700,1896.37 P2.56@2700,2362.2
FSMC_D15: P2.53 U1.79 | length 1603.4
  Top Layer w10: U1.79@1859.77,1412.48 1914.14,1466.84 1914.14,1467.06 v1(1914.14,1476.11)
  Bottom Layer w10: v1(1914.14,1476.11) 1914.14,1475.39 1913.96,1475.39 1913.96,1493.96 1950,1530 2120,1530 2178.75,1588.75 2356.88,1588.75 2650,1881.88 2650,2412.2 P2.53@2600,2462.2
FSMC_INT3: P2.44 U1.92 | length 1031.1
  Top Layer w10: U1.92@1678.82,1593.43 1730,1644.61 1730,1720 1790,1780 v1(1790,1790)
  Bottom Layer w10: v1(1790,1790) 1940,1790 2075,1925 2075,2215 2100,2240 P2.44@2100,2362.2
FSMC_INTR: P1.20 U1.22 | length 1361.3
  Top Layer w10: U1.22@1122.04,897.46 1214.58,990 v1(1230,990)
  Bottom Layer w10: P1.20@900,0 890,0 850,40 850,220 870,240 940,240 1101,401 1101,671 1200,770 1200,940 1230,970 v1(1230,990)
FSMC_NBL0: P2.5 U1.141 | length 1978.8
  Top Layer w10: v1(490,1280) 560,1280 679.39,1399.39 842.82,1399.39 U1.141@871.49,1370.72
  Bottom Layer w10: P2.5@200,2462.2 250,2412.2 250,2312.2 130,2192.2 130,1410.87 252.37,1288.5 481.5,1288.5 v1(490,1280)
FSMC_NBL1: P2.6 U1.142 | length 2021.8
  Top Layer w10: U1.142@857.57,1356.8 894.37,1320 v1(900,1320)
  Bottom Layer w10: P2.6@200,2362.2 200,2300 110,2210 110,1401.11 355.11,1156 746,1156 857,1267 857,1267.81 885.82,1296.63 886.63,1296.63 900,1310 v1(900,1320)
FSMC_NE2: P2.19 U1.124 | length 1003.3
  Top Layer w10: v1(1000,1680) 1035.47,1680 U1.124@1108.12,1607.35
  Bottom Layer w10: P2.19@900,2462.2 950,2412.2 950,2330 900,2280 900,1780 v1(1000,1680)
FSMC_NE3: P2.20 U1.125 | length 899.5
  Top Layer w10: v1(970,1660) 980,1650 1037.63,1650 U1.125@1094.2,1593.43
  Bottom Layer w10: P2.20@900,2362.2 880,2342.2 880,1750 v1(970,1660)
FSMC_NE4: P2.18 U1.127 | length 965.5
  Top Layer w10: v1(913,1620) 923,1610 1021.95,1610 U1.127@1066.36,1565.59
  Bottom Layer w10: P2.18@800,2362.2 826.69,2335.51 826.69,1705.31 912,1620 v1(913,1620)
FSMC_NIORD: P1.16 U1.18 | length 1229.1
  Top Layer w10: v1(1018,862.63) 1019.27,862.63 1020,863.37 1020,906.77 U1.18@1066.36,953.14
  Bottom Layer w10: P1.16@700,0 650,50 650,210 780,340 920,340 1018,438 v1(1018,862.63)
FSMC_NIOS16: P1.40 U1.49 | length 999.1
  Top Layer w10: U1.49@1623.14,869.62 1668.76,824 1691,824 1723,792 v1(1726,792)
  Bottom Layer w10: v1(1726,792) 1726,788.99 1850,664.99 1850,50 P1.40@1900,0
FSMC_NIOWR: P1.18 U1.20 | length 1351.1
  Top Layer w10: U1.20@1094.2,925.3 1160,991.1 v1(1160,1000)
  Bottom Layer w10: P1.18@800,0 750,50 750,210 820,280 920,280 1061.94,421.94 1061.94,691.94 1160,790 v1(1160,1000)
FSMC_NOE: P2.25 U1.118 | length 930.2
  Top Layer w10: v1(1054,1928) 1054,1828.5 U1.118@1191.64,1690.86
  Bottom Layer w10: v1(1054,1928) 1054,1954 1250,2150 1250,2412.2 P2.25@1200,2462.2
FSMC_NREG: P1.15 U1.19 | length 1054.7
  Top Layer w10: v1(1041.06,841.06) 1041.06,900 U1.19@1080.28,939.22
  Bottom Layer w10: P1.15@700,100 700,190 810,300 909,300 1041.06,432.06 v1(1041.06,841.06)
FSMC_NWAIT: P2.21 U1.122 | length 1005.4
  Top Layer w10: v1(948,1922) 970,1900 970,1801.15 U1.122@1135.96,1635.19
  Bottom Layer w10: v1(948,1922) 938,1932 938,2238 990,2290 1040,2290 1050,2300 1050,2412.2 P2.21@1000,2462.2
FSMC_NWE: P2.26 U1.119 | length 918.6
  Top Layer w10: v1(1030,1970) 1029.13,1969.13 1029.13,1825.54 U1.119@1177.72,1676.95
  Bottom Layer w10: v1(1030,1970) 1030,1990 1000,2020 1000,2210 1021,2231 1151,2231 1200,2280 P2.26@1200,2362.2